# Altium PCB PCB1.PcbDoc
Units mil, origin at the board's own origin, x right, y up, seen from the top; angles counter-clockwise.
Board outline 6000 x 4000 mil, 2 copper layers (Top Layer, Bottom Layer); 7 components, 1 nets, 117 pads, 0 vias.
Unrouted connection lines stored in the file: 2.
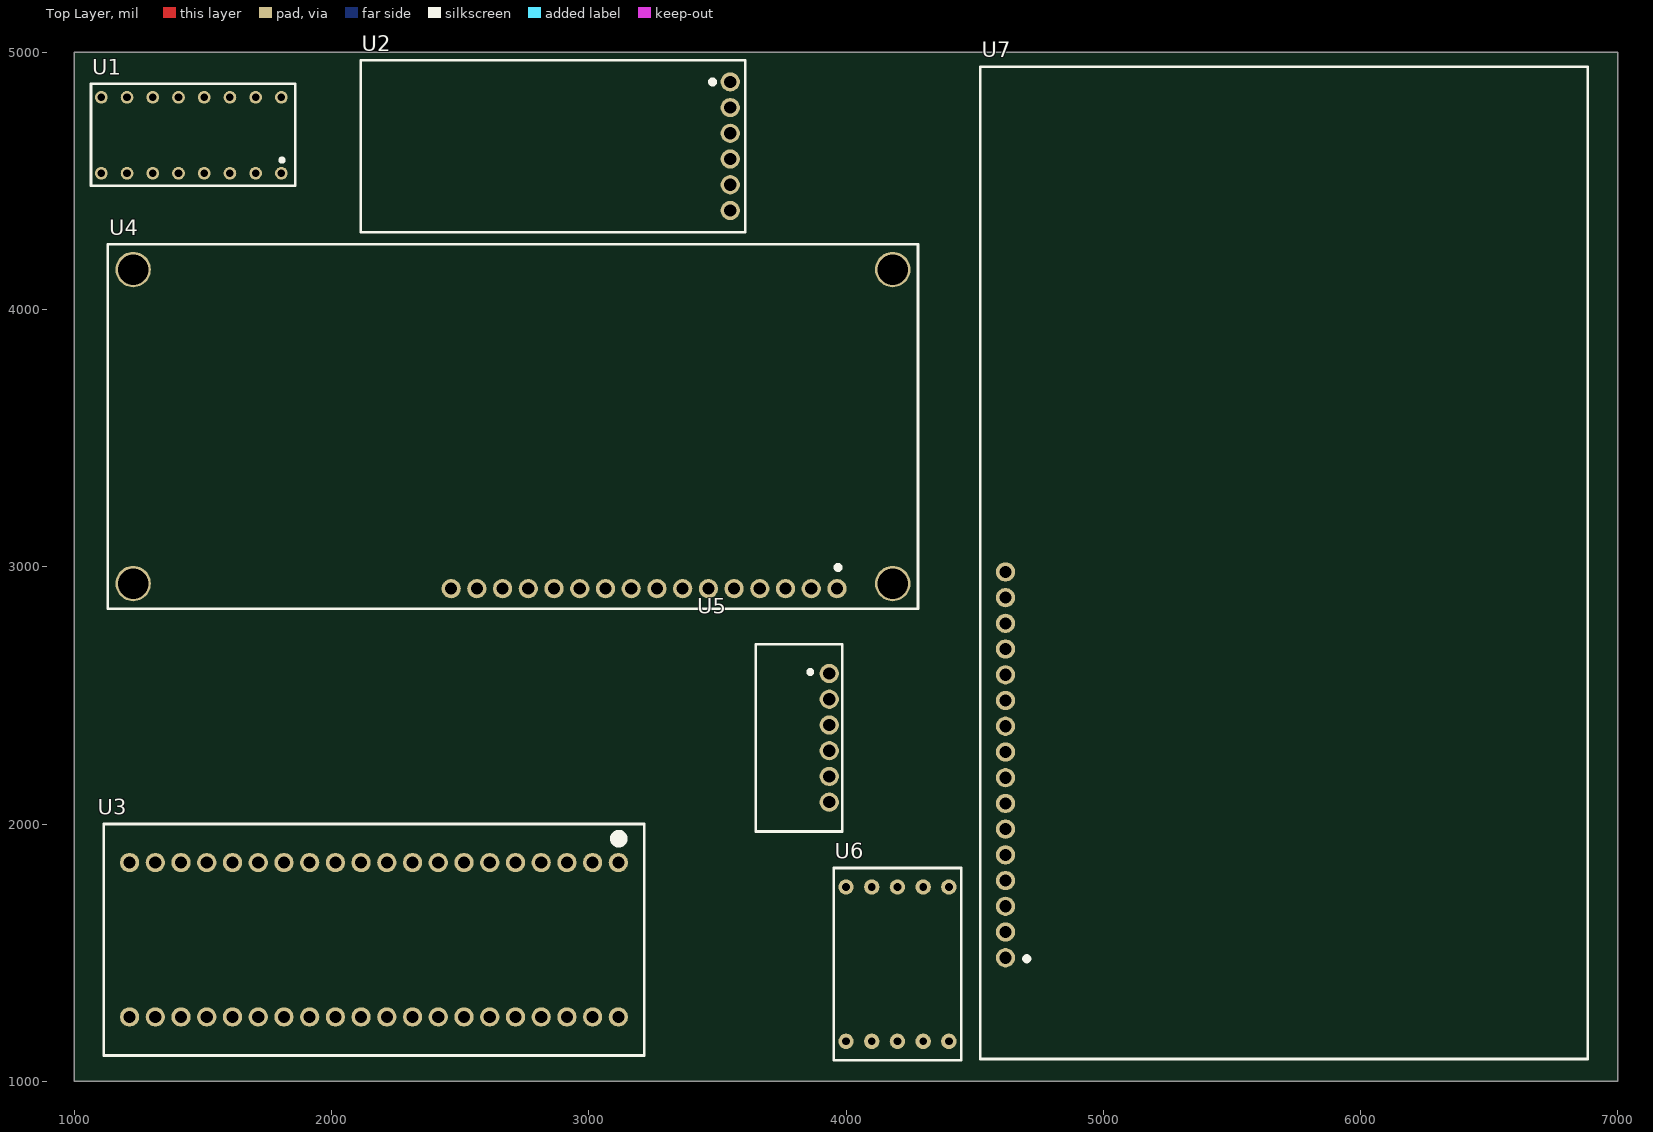
[diagram p0: Top Layer view]
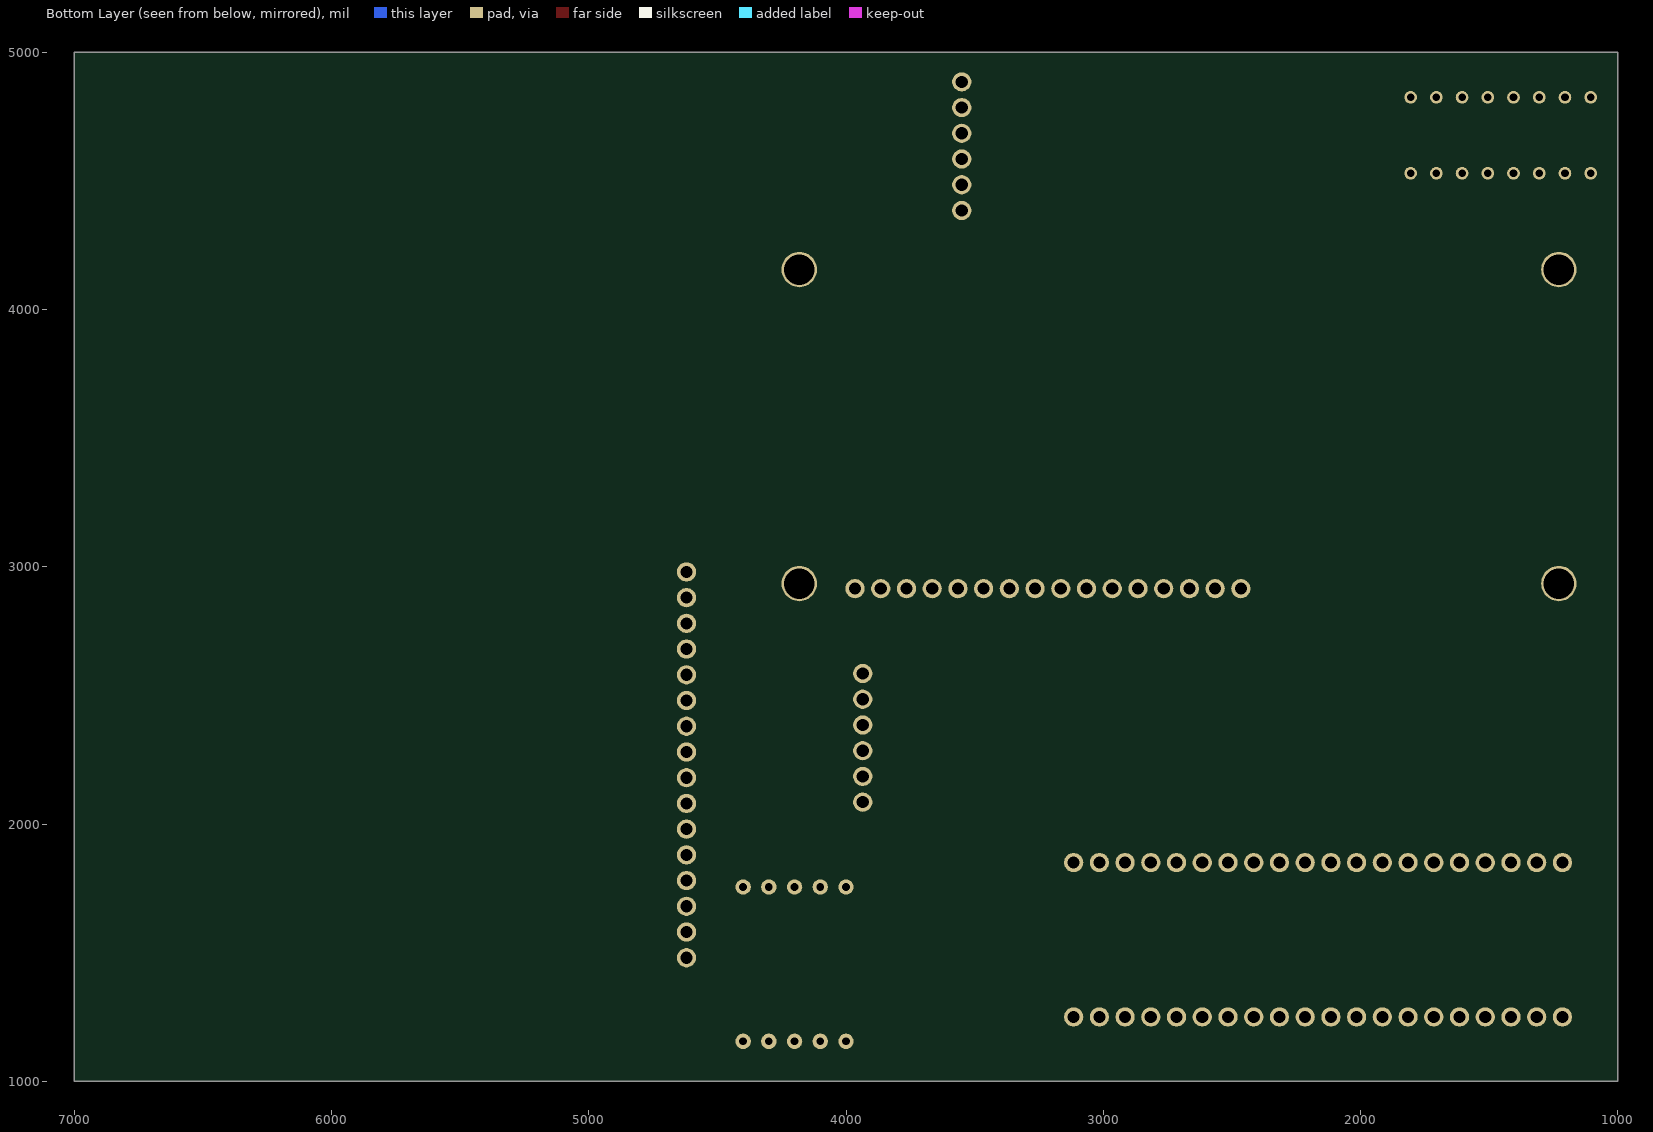
[diagram p1: Bottom Layer view, seen from below]

## Layer stack, top to bottom
Top Solder: solder mask 0.4, Solder Resist, Dk 3.5
Top Layer: signal copper 1.4
Dielectric 1: dielectric 12.6, FR-4, Dk 4.8
Bottom Layer: signal copper 1.4
Bottom Solder: solder mask 0.4, Solder Resist, Dk 3.5

## Board outline
1000,1000 7000,1000 7000,5000 1000,5000

## Design rules (kind name [scope] priority, off if disabled: settings)
Clearance [All] p1: gap=10 ignorepadtopadclearanceinfootprint=FALSE except(0: Arc-Hole Track-Hole SMDPad-Hole THPad-Hole Via-Hole Fill-Hole Poly-Hole Region-Hole Text-Hole)
PolygonConnect [All] p1: connectstyle=Relief reliefconductorwidth=10 reliefentries=4 polygonreliefangle="90 Angle" airgapwidth=10
RoutingVias [All] p1: holewidth=28 width=50 viastyle="Through Hole" minholewidth=28 minwidth=50 maxholewidth=28 maxwidth=50
SolderMaskExpansion [All] p1: expansion=4 istentingtop=FALSE
Width [All] p1: maxlimit=10 minlimit=10 preferedwidth=10
30 further rules are at their usual default settings.

## Classes and differential pairs
component class Sheet1: U1 U2 U3 U5 U6 U7

## Components (designator, comment, footprint, x,y, rotation, side; value= is the part's Value field where it differs from the comment)
U1 "74HC595" 74HC595 1705,4825 r0 top
U2 "module HC-05" HC-05 3550,4635 r90 top
U3 "Bluepill" STM32F103C8T6 2165,1550 r180 top
U4 "LCD" "LCD 1602" 2705.16,4224.06 r180 top
U5 "I2C community" RTC_DS3231 3463.35,2295.63 r0 top
U6 "LED 7 - segment" "LED 7 - segment" 4200,1455 r0 top
U7 "LCD" "LCD 2004" 5332.6,2798.5 r90 top

## Footprints (in the part's own frame and the unit in brackets; to place one, negate y for a bottom-side part, rotate by r counter-clockwise, add the part's x,y. Pads: shape width x height; smd on the part's side, far side on the other; paste and mask are expansions set on the pad)
74HC595 [mm] "OC PWM CLOCK"
  round 1.25 hole 0.75: 1(2.54,-7.5) 2(0,-7.5) 3(-2.54,-7.5) 4(-5.08,-7.5) 5(-7.62,-7.5) 6(-10.16,-7.5) 7(-12.7,-7.5) 8(-15.24,-7.5) 9(-15.24,0) 10(-12.7,0) 11(-10.16,0) 12(-7.62,0) 13(-5.08,0) 14(-2.54,0) 15(0,0) 16(2.54,0)
  silkscreen extent -16.25,-8.75 3.93,1.35, body extent -15.68,-7.45 3.32,0.05, height 3.5
HC-05 [mm] "module"
  round 1.9 hole 1.2: 1(6.35,0) 2(3.81,0) 3(1.27,0) 4(-1.27,0) 5(-3.81,0) 6(-6.35,0) ""(-1.27,0)
  silkscreen extent -8.5,-1.5 8.5,36.5, body extent -7.85,-1.3 7.85,36.3, height 6.31
"LCD 1602" [mm]
  round 1.9 hole 1.2: 1(-32,33.25) 2(-29.46,33.25) 3(-26.92,33.25) 4(-24.38,33.25) 5(-21.84,33.25) 6(-19.3,33.25) 7(-16.76,33.25) 8(-14.22,33.25) 9(-11.68,33.25) 10(-9.14,33.25) 11(-6.6,33.25) 12(-4.06,33.25) 13(-1.52,33.25) 14(1.02,33.25) 15(3.56,33.25) 16(6.1,33.25)
  round 3.5 hole 3: ""(-37.5,32.75) ""(-37.5,1.75) ""(-37.5,1.75) ""(37.5,1.75) ""(37.5,32.75)
  silkscreen extent -40,-0.75 40,35.25, body extent -40,-0.75 40,35.05, height 5.5
"LCD 2004" [mm]
  round 1.9 hole 1.2: 1(-33.49,18.1) 2(-30.95,18.1) 3(-28.41,18.1) 4(-25.87,18.1) 5(-23.33,18.1) 6(-20.79,18.1) 7(-18.25,18.1) 8(-15.71,18.1) 9(-13.17,18.1) 10(-10.63,18.1) 11(-8.09,18.1) 12(-5.55,18.1) 13(-3.01,18.1) 14(-0.47,18.1) 15(2.07,18.1) 16(4.61,18.1)
  silkscreen extent -43.49,-39.4 54.51,20.6, body extent -43.52,-39.34 54.54,20.6, height 11.24
"LED 7 - segment" [mil]
  round 60 hole 30: 1(-200,-300) 1(-200,-300) 2(-100,-300) 3(0,-300) 4(100,-300) 5(200,-300) 6(200,300) 7(100,300) 8(0,300) 9(-100,300) 10(-200,300)
  silkscreen extent -248,-374 248,374
RTC_DS3231 [mm] "I2C module"
  round 1.9 hole 1.2: 1(11.98,7.35) 2(11.98,4.81) 3(11.98,2.27) 4(11.98,-0.27) 5(11.98,-2.81) 6(11.98,-5.35)
  silkscreen extent 4.7,-8.25 13.25,10.25, body extent -1.3,-10.3 12.23,12.5, height 2.45
STM32F103C8T6 [mm]
  round 1.9 hole 1.2 mask+0.102: 1(-24.13,-7.62) 2(-21.59,-7.62) 3(-19.05,-7.62) 4(-16.51,-7.62) 5(-13.97,-7.62) 6(-11.43,-7.62) 7(-8.89,-7.62) 8(-6.35,-7.62) 9(-3.81,-7.62) 10(-1.27,-7.62) 11(1.27,-7.62) 12(3.81,-7.62) 13(6.35,-7.62) 14(8.89,-7.62) 15(11.43,-7.62) 16(13.97,-7.62) 17(16.51,-7.62) 18(19.05,-7.62) 19(21.59,-7.62) 20(24.13,-7.62) 21(24.13,7.62) 22(21.59,7.62) 23(19.05,7.62) 24(16.51,7.62) 25(13.97,7.62) 26(11.43,7.62) 27(8.89,7.62) 28(6.35,7.62) 29(3.81,7.62) 30(1.27,7.62) 31(-1.27,7.62) 32(-3.81,7.62) 33(-6.35,7.62) 34(-8.89,7.62) 35(-11.43,7.62) 36(-13.97,7.62) 37(-16.51,7.62) 38(-19.05,7.62) 39(-21.59,7.62) 40(-24.13,7.62)
  silkscreen extent -26.67,-11.43 26.67,11.43, body extent -30.02,-11.35 27.54,11.51, height 12.31

## Part data
U2: library part HC-05
U3: library part STM32F103C8T6
U5: library part "RTC DS3231"

## Nets (pads, with @x,y where several pads share a name; then routed paths per layer and width w, separated by ;. In a path a pad name is that pad's centre, name@x,y a point inside that pad or via, vN(x,y) a via of type N, cw(c..) or ccw(c..) an arc to the next point about the centre after c; other vN are vias at no path point)
NetU2_1: U2.1 U2.2 U3.9
pads on no net: U1.1 U1.2 U1.3 U1.4 U1.5 U1.6 U1.7 U1.8 U1.9 U1.10 U1.11 U1.12 U1.13 U1.14 U1.15 U1.16 U2. U2.3 U2.4 U2.5 U2.6 U3.1 U3.2 U3.3 U3.4 U3.5 U3.6 U3.7 U3.8 U3.10 U3.11 U3.12 U3.13 U3.14 U3.15 U3.16 U3.17 U3.18 U3.19 U3.20 U3.21 U3.22 U3.23 U3.24 U3.25 U3.26 U3.27 U3.28 U3.29 U3.30 U3.31 U3.32 U3.33 U3.34 U3.35 U3.36 U3.37 U3.38 U3.39 U3.40 U4. U4.1 U4.2 U4.3 U4.4 U4.5 U4.6 U4.7 U4.8 U4.9 U4.10 U4.11 U4.12 U4.13 U4.14 U4.15 U4.16 U5.1 U5.2 U5.3 U5.4 U5.5 U5.6 U6.1 U6.2 U6.3 U6.4 U6.5 U6.6 U6.7 U6.8 U6.9 U6.10 U7.1 U7.2 U7.3 U7.4 U7.5 U7.6 U7.7 U7.8 U7.9 U7.10 U7.11 U7.12 U7.13 U7.14 U7.15 U7.16